# Altium PCB PCB1.PcbDoc
Units mm, origin at the board's own origin, x right, y up, seen from the top; angles counter-clockwise.
Board outline 106.01 x 106.01 mm, 2 copper layers (Top Layer, Bottom Layer), stack 1.371 mm thick; 27 components, 45 nets, 204 pads, 50 vias.
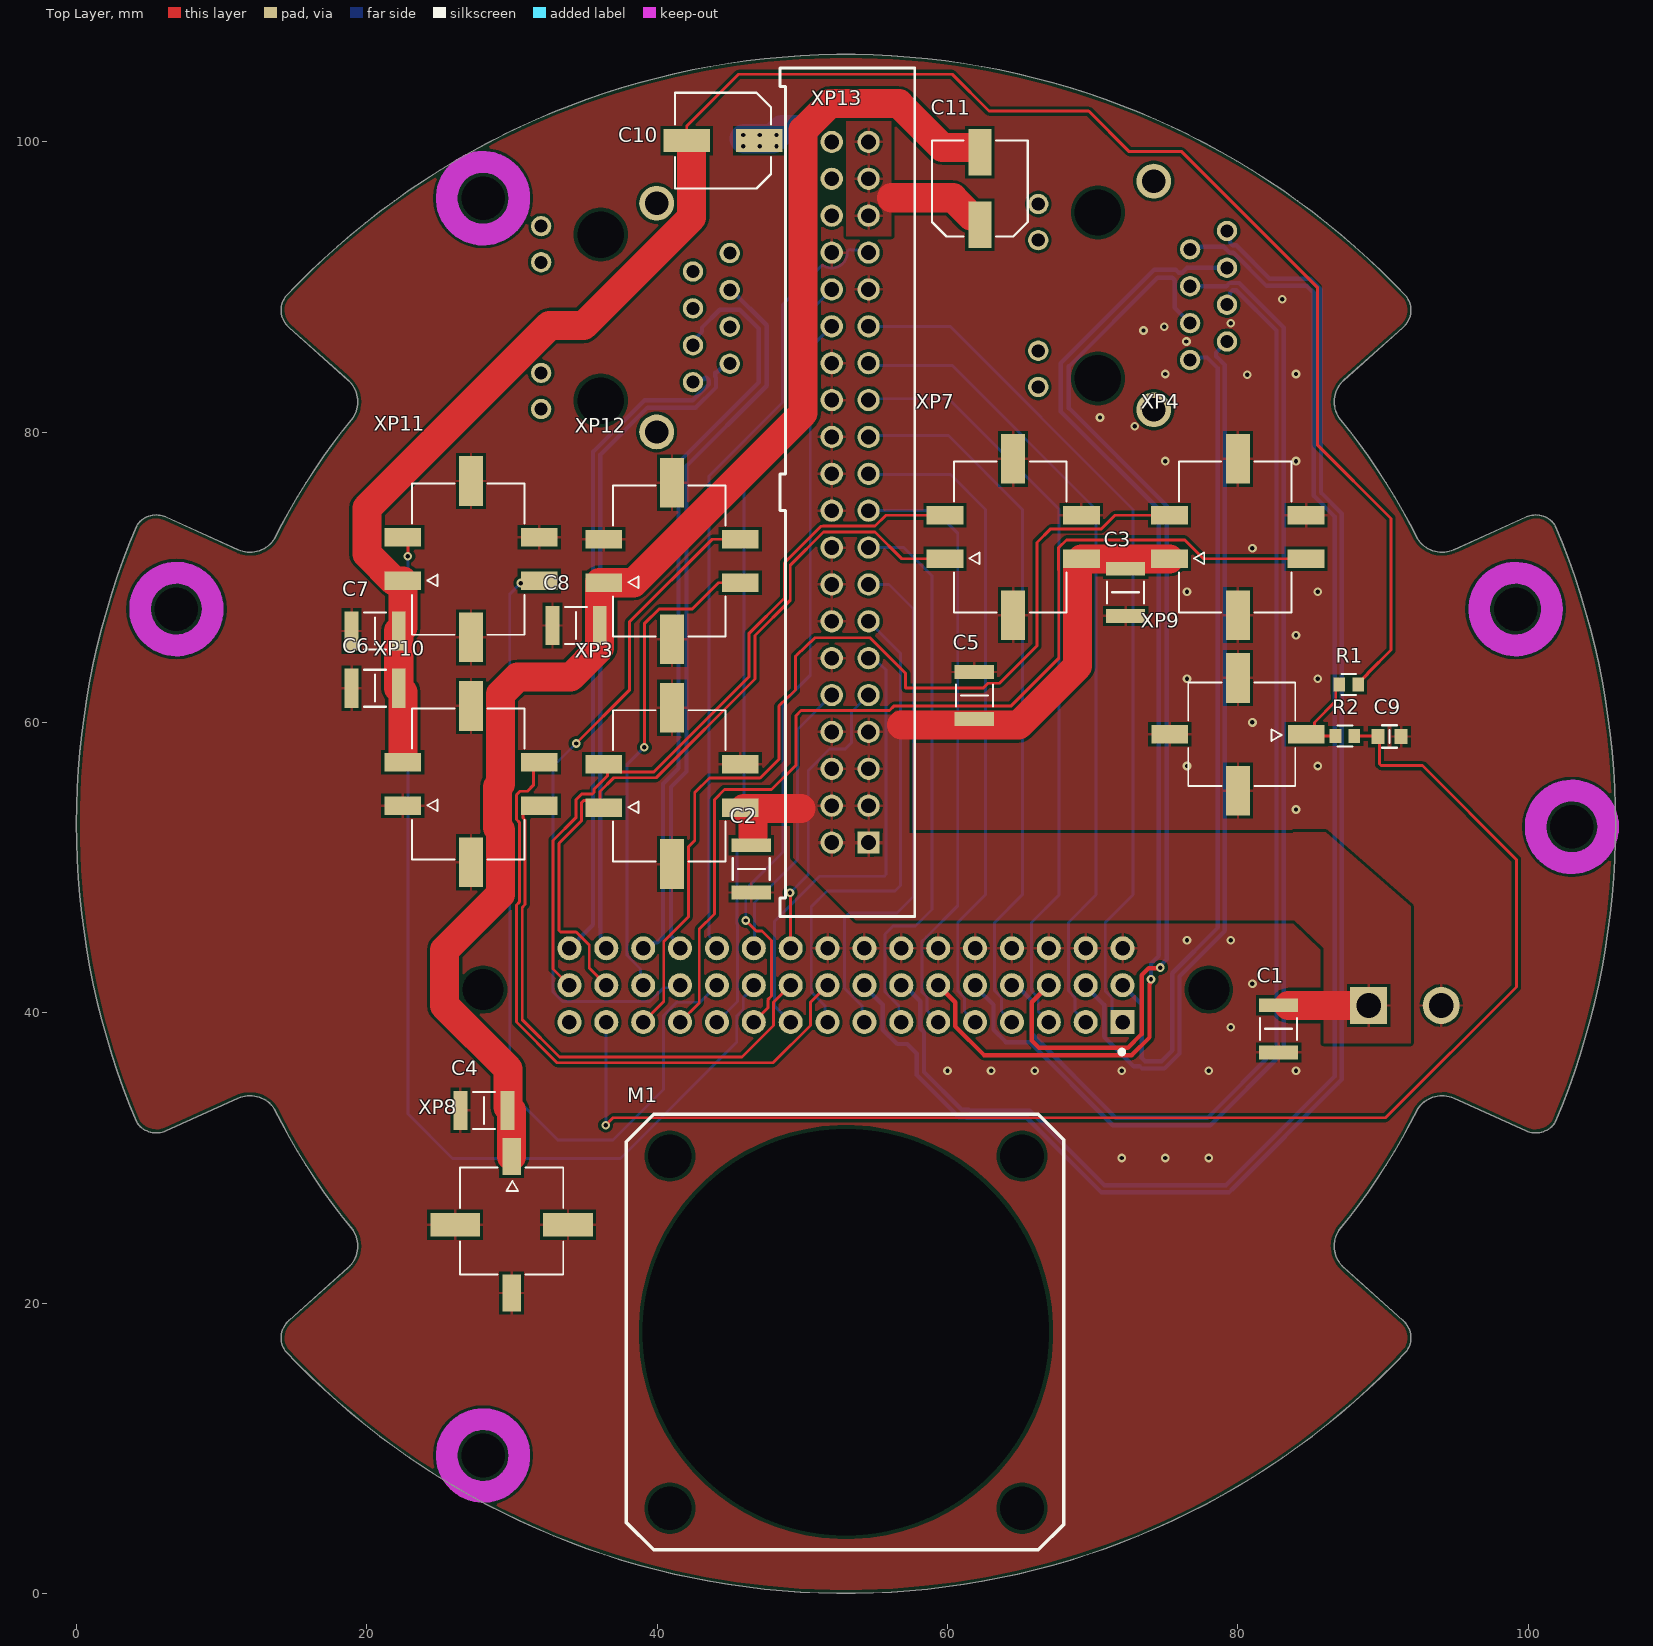
[diagram p0: Top Layer view]
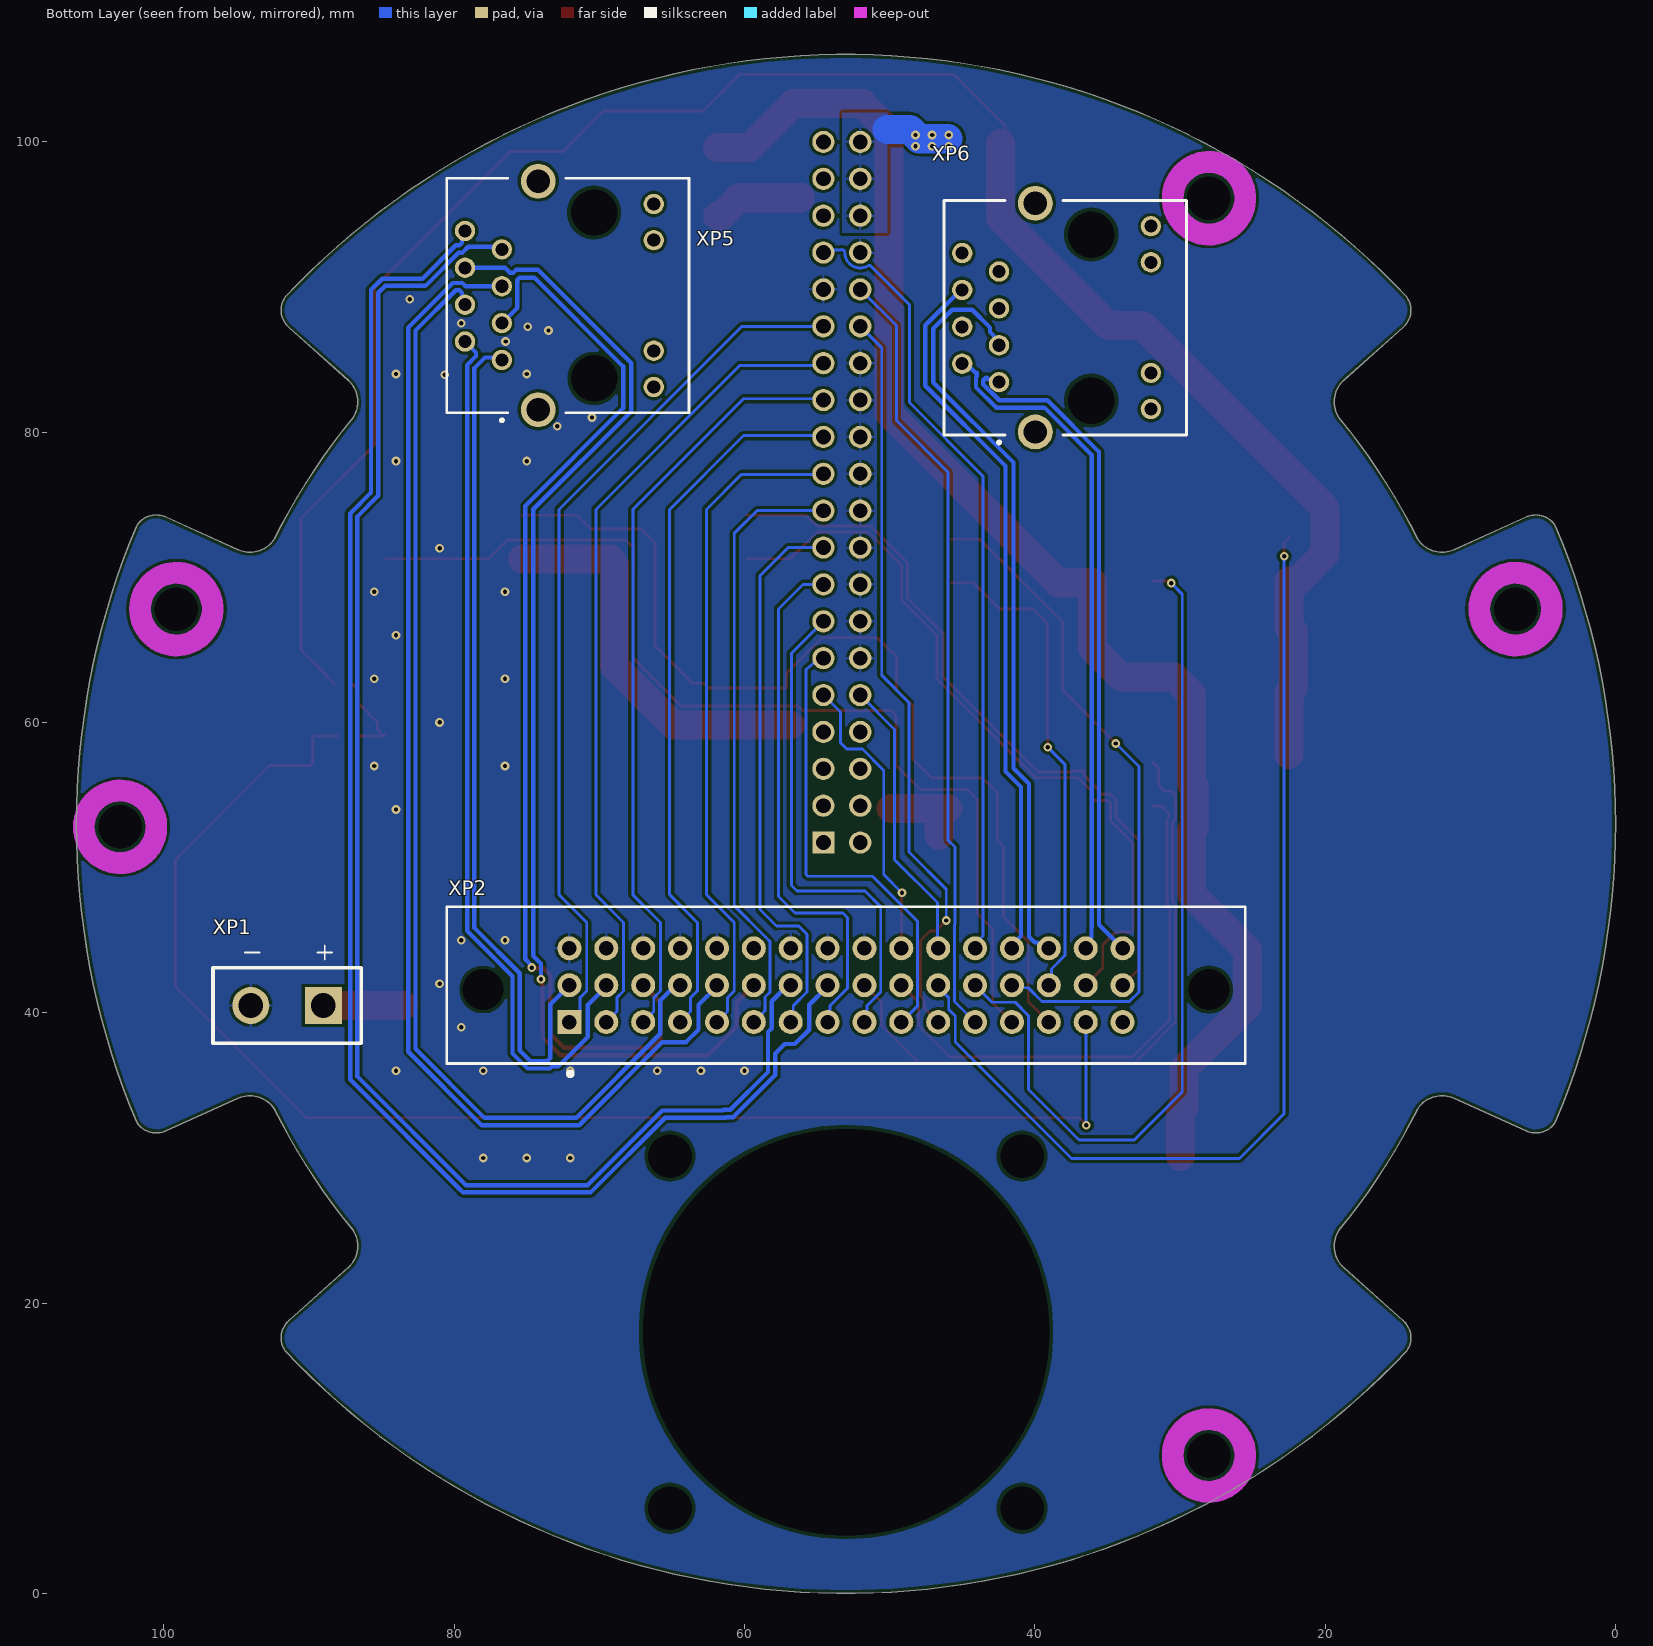
[diagram p1: Bottom Layer view, seen from below]
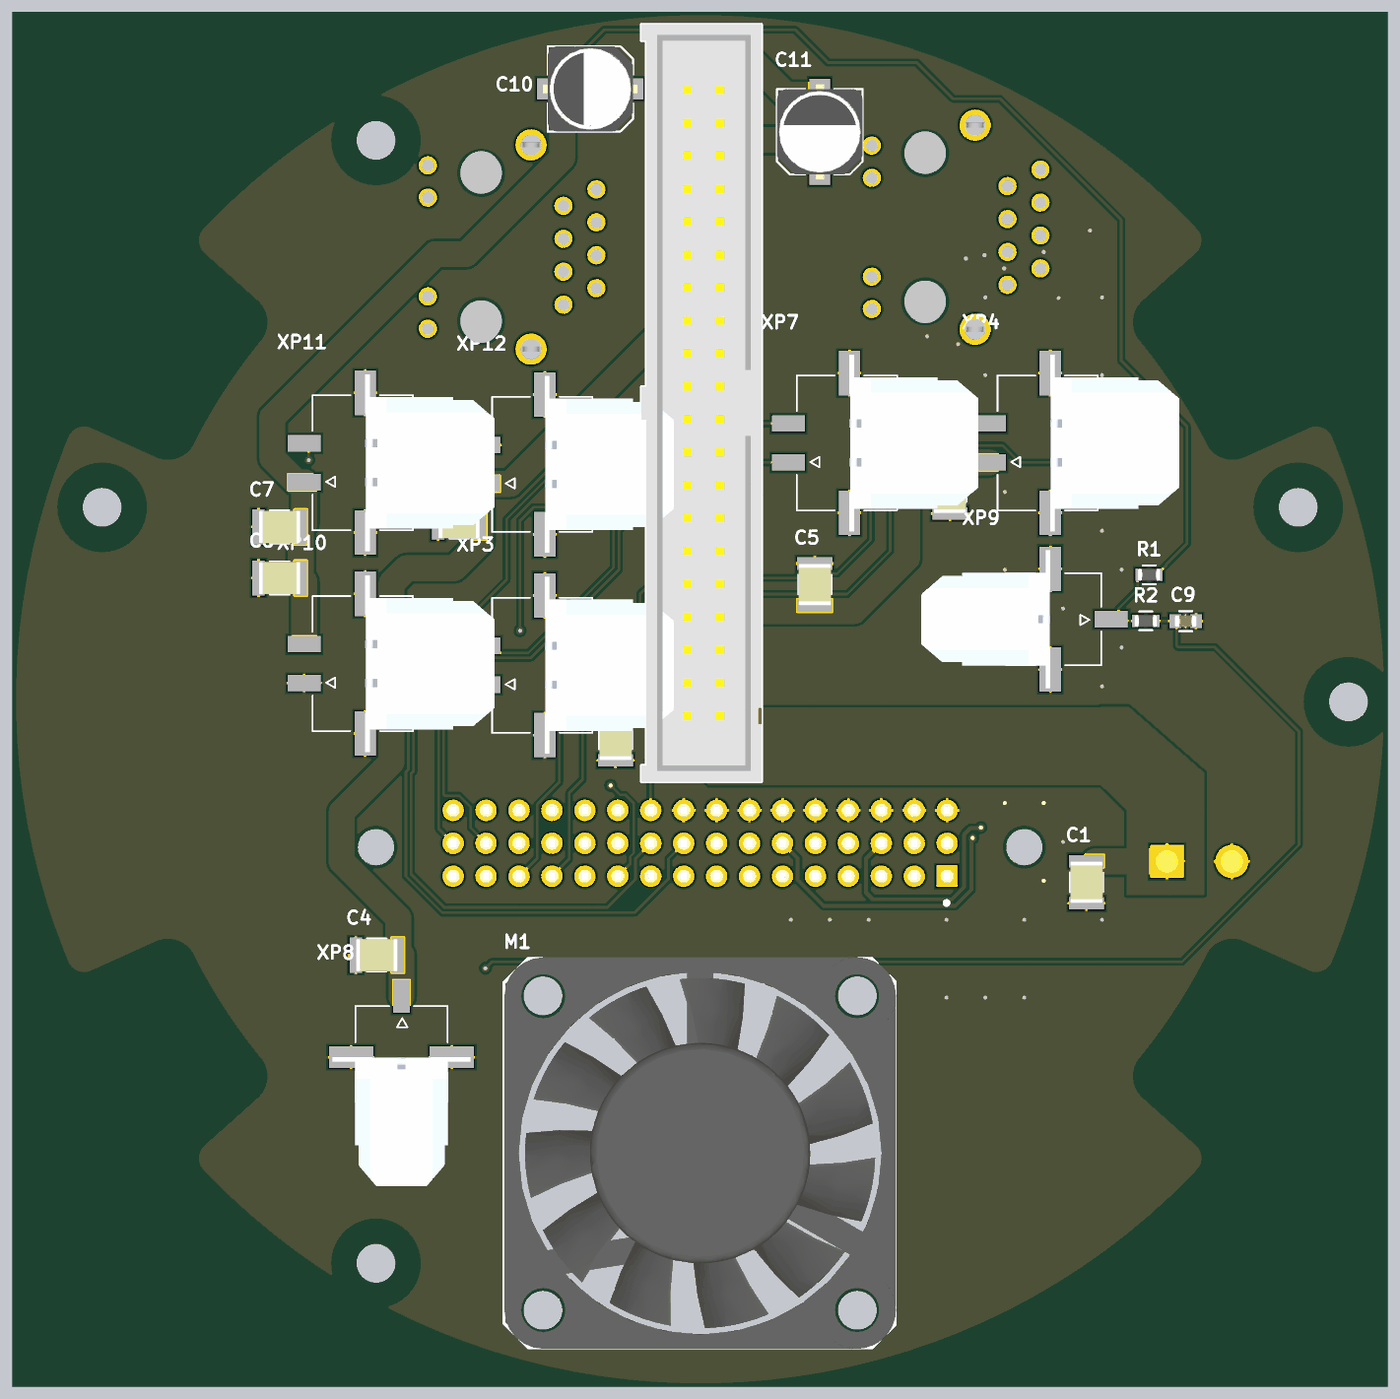
[diagram p2: 3D render of the assembled board from above, using the file's embedded part models]
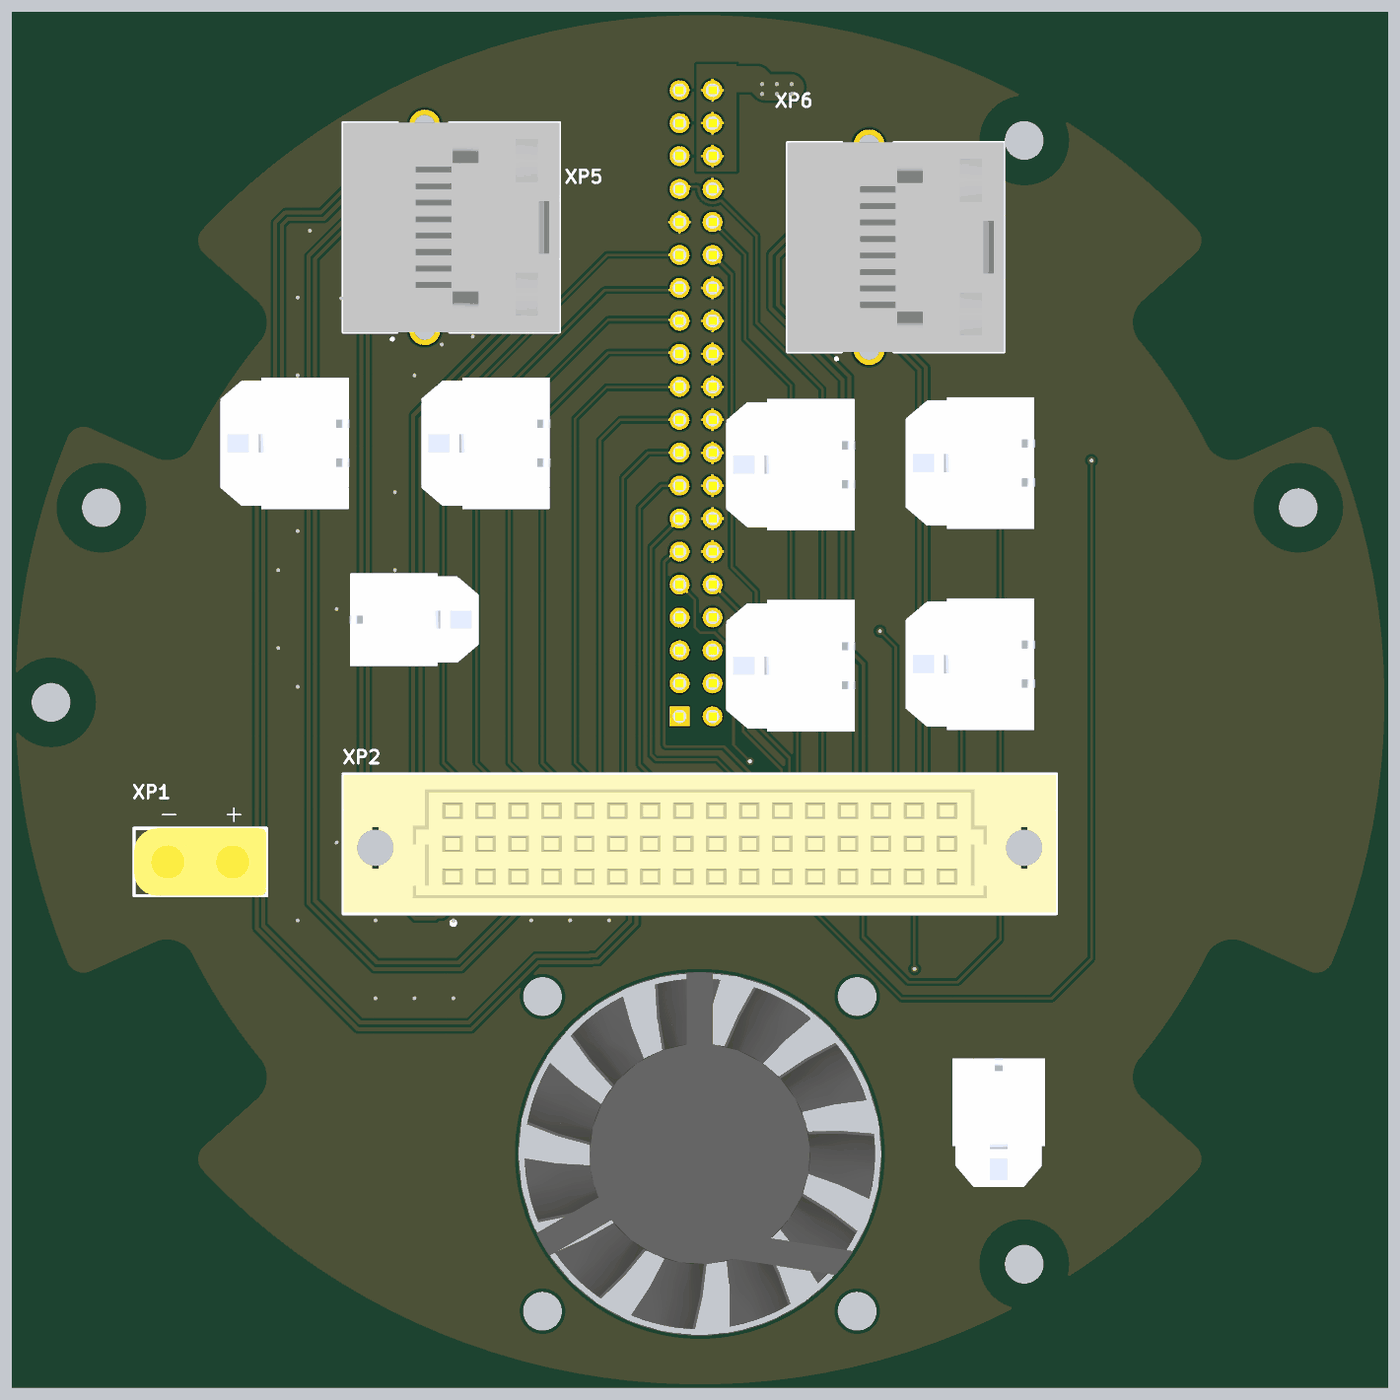
[diagram p3: 3D render of the assembled board from below, using the file's embedded part models]

## Layer stack, top to bottom
Top Solder: solder mask 0.0102, Solder Resist, Dk 3.5
Top Layer: signal copper 0.0356
Dielectric 1: dielectric 1.3, FR-4, Dk 4.8
Bottom Layer: signal copper 0.0356
Bottom Solder: solder mask 0.0102, Solder Resist, Dk 3.5

## Board outline
6.16,31.863 cw(c5.499,33.327) 4.14,32.469 4.139,32.472 cw(c53.007,53.006) 4.139,73.541 4.14,73.543 cw(c5.499,72.686) 6.16,74.15 11.14,71.903 ccw(c11.96,73.72) 13.632,72.634 cw(c53.007,53.006) 19.061,80.994 ccw(c17.389,82.079) 19.382,82.079 ccw(c17.389,82.079) 18.715,83.567 14.637,87.203 18.522,83.74 14.637,87.203 cw(c15.706,88.403) 14.37,89.295 14.371,89.297 cw(c53.007,53.006) 91.642,89.297 91.644,89.295 cw(c90.308,88.403) 91.914,88.403 cw(c90.308,88.403) 91.377,87.203 87.492,83.74 87.298,83.567 91.377,87.203 87.298,83.567 ccw(c88.624,82.079) 86.952,80.994 cw(c53.007,53.006) 92.382,72.634 ccw(c94.053,73.72) 94.873,71.903 99.853,74.15 95.109,72.01 99.854,74.15 cw(c100.514,72.686) 101.873,73.543 101.874,73.541 cw(c53.007,53.006) 106.014,53.006 cw(c53.007,53.006) 101.874,32.472 101.873,32.469 cw(c100.514,33.327) 99.854,31.863 94.873,34.11 ccw(c94.053,32.293) 94.056,34.286 ccw(c94.078,32.293) 92.406,33.379 92.395,33.386 cw(c94.078,32.293) 92.98,33.973 ccw(c94.053,32.293) 92.382,33.379 cw(c53.007,53.006) 86.952,25.019 ccw(c88.624,23.933) 87.298,22.446 91.377,18.81 87.492,22.273 91.377,18.81 cw(c90.308,17.61) 91.914,17.61 cw(c90.308,17.61) 91.644,16.718 91.642,16.716 cw(c53.007,53.006) 14.371,16.716 14.37,16.718 cw(c15.706,17.61) 14.637,18.81 18.522,22.273 18.715,22.446 14.637,18.81 18.715,22.446 ccw(c17.389,23.933) 19.382,23.933 ccw(c17.389,23.933) 19.061,25.019 cw(c53.007,53.006) 13.632,33.379 ccw(c11.96,32.293) 11.14,34.11

## Design rules (kind name [scope] priority, off if disabled: settings)
AcuteAngle [All] p1: minimum=3.50000000000000E+0001 checktracksonly=FALSE
BoardOutlineClearance "BoardOutlineClearance 1" [All] p1: gap=0.25 ignorepadtopadclearanceinfootprint=FALSE except(0: Arc-SplitContinuation Track-SplitContinuation SMDPad-SplitContinuation THPad-SplitContinuation Via-SplitContinuation Fill-SplitContinuation Poly-SplitContinuation Region-SplitContinuation Text-SplitContinuation) // Milling
BoardOutlineClearance "BoardOutlineClearance 2" [All] p2: gap=0.4 ignorepadtopadclearanceinfootprint=FALSE except(0: Arc-SplitContinuation Track-SplitContinuation SMDPad-SplitContinuation THPad-SplitContinuation Via-SplitContinuation Fill-SplitContinuation Poly-SplitContinuation Region-SplitContinuation Text-SplitContinuation) // V-Cut
Clearance "Clearance-1 1 Oz" [All] p1: gap=0.2 ignorepadtopadclearanceinfootprint=FALSE except(0.25: Arc-Hole Track-Hole SMDPad-Hole THPad-Hole Via-Hole Fill-Hole Poly-Hole Region-Hole Text-Hole) // Standart
Clearance "Clearance-2 1 Oz" [All] p2: gap=0.15 ignorepadtopadclearanceinfootprint=FALSE except(0.2: Arc-Fill Arc-Poly Track-Fill Track-Poly SMDPad-Fill SMDPad-Poly THPad-Fill THPad-Poly Via-Fill Via-Poly Fill-Fill Fill-Poly Poly-Poly; 0.25: Arc-Hole Track-Hole SMDPad-Hole THPad-Hole Via-Hole Fill-Hole Poly-Hole Region-Hole Text-Hole) // Advance
Clearance "Clearance 2 Oz" [All] p3: gap=0.3 ignorepadtopadclearanceinfootprint=FALSE except(0.25: Arc-Hole Track-Hole SMDPad-Hole THPad-Hole Via-Hole Fill-Hole Poly-Hole Region-Hole Text-Hole)
Clearance "Clearance-1 1/2 Oz" [All] p4: gap=0.125 ignorepadtopadclearanceinfootprint=FALSE except(0.2: Arc-Fill Arc-Poly Track-Fill Track-Poly SMDPad-SMDPad SMDPad-Fill SMDPad-Poly THPad-Fill THPad-Poly Via-Fill Via-Poly Fill-Fill Fill-Poly Poly-Poly Poly-Region Poly-Text; 0.25: Arc-Hole Track-Hole SMDPad-Hole THPad-Hole Via-Hole Fill-Hole Poly-Hole Region-Hole Text-Hole) // Standart
Clearance "Clearance-2 1/2 Oz" [All] p5: gap=0.1 ignorepadtopadclearanceinfootprint=FALSE except(0.15: Arc-Fill Arc-Poly Track-Fill Track-Poly SMDPad-SMDPad SMDPad-Fill SMDPad-Poly THPad-Fill THPad-Poly Via-Fill Via-Poly Fill-Fill Fill-Poly Poly-Poly Poly-Region Poly-Text; 0.25: Arc-Hole Track-Hole SMDPad-Hole THPad-Hole Via-Hole Fill-Hole Poly-Hole Region-Hole Text-Hole) // Advance
Clearance "Clearance 3 Oz" [All] p6: gap=0.35 ignorepadtopadclearanceinfootprint=FALSE except(0.25: Arc-Hole Track-Hole SMDPad-Hole THPad-Hole Via-Hole Fill-Hole Poly-Hole Region-Hole Text-Hole)
DiffPairsRouting "DiffPairsRouting 1 Oz" [All] p1: maxlimit=0.254 minlimit=0.2 mostfreqgap=0.254 toplayer_minwidth=0.2 toplayer_maxwidth=0.381 toplayer_prefwidth=0.381 bottomlayer_minwidth=0.2 bottomlayer_maxwidth=0.381 bottomlayer_prefwidth=0.381 maxuncoupledlength=12.7
DiffPairsRouting "DiffPairsRouting 1/2 Oz" [All] p2: maxlimit=0.254 minlimit=0.1 mostfreqgap=0.254 toplayer_minwidth=0.1 toplayer_maxwidth=0.381 toplayer_prefwidth=0.381 bottomlayer_minwidth=0.1 bottomlayer_maxwidth=0.381 bottomlayer_prefwidth=0.381 maxuncoupledlength=12.7
HoleSize [HasPad('M1-0')] p1: absolutevalues=TRUE maxlimit=100 minlimit=0.025 maxpercent=80.000 minpercent=20.000
HoleSize "Minimum HoleSize" [IsPad] p2: absolutevalues=TRUE maxlimit=5.9 minlimit=0.6 maxpercent=80.000 minpercent=20.000
HoleSize "Minimum HoleSize VIA 1" [IsVia] p3: absolutevalues=TRUE maxlimit=5.9 minlimit=0.3 maxpercent=80.000 minpercent=20.000 // Standart
HoleSize "Minimum HoleSize VIA 2" [IsVia] p4: absolutevalues=TRUE maxlimit=5.9 minlimit=0.2 maxpercent=80.000 minpercent=20.000 // Advance
HoleToHoleClearance Hole2HoleClearance [All] p1: gap=0.25 allowstackedmicrovias=FALSE
MinimumAnnularRing "Minimum AR VIA Standart" [IsVia] p1: minimumring=0.15
MinimumAnnularRing "Minimum AR PAD Standart" [IsPAD] p2: minimumring=0.2
MinimumAnnularRing "Minimum AR VIA Advance" [IsVia] p3: minimumring=0.1
MinimumAnnularRing "Minimum AR PAD Advance" [IsPAD] p4: minimumring=0.15
MinimumSolderMaskSliver "SolderMask Bridge Standart" [All] p1: minsoldermaskwidth=0.15 // All Masks
MinimumSolderMaskSliver "SolderMask Bridge Advance" [All] p2: minsoldermaskwidth=0.1 // Mask LDI
PlaneClearance "PlaneClearance 1 Oz" [All] p1: clearance=0.2
PlaneClearance "PlaneClearance-1 1/2 Oz" [All] p2: clearance=0.2 // Standart
PlaneClearance "PlaneClearance-2 1/2 Oz" [All] p3: clearance=0.15 // Advance
PlaneClearance "PlaneClearance 3 Oz" [All] p4: clearance=0.35
PlaneClearance "PlaneClearance 2 Oz" [All] p5: clearance=0.3
PlaneConnect "TermalConnect-1 1 Oz" [All] p1: planeconnectstyle=Relief reliefexpansion=0.2 reliefentries=4 reliefconductorwidth=0.2 reliefairgap=0.2 // Standart
PlaneConnect "TermalConnect-2 1 Oz" [All] p2: pad.planeconnectstyle=Relief pad.reliefexpansion=0.15 pad.reliefentries=4 pad.reliefconductorwidth=0.2 pad.reliefairgap=0.2 via.planeconnectstyle=Direct via.reliefexpansion=0.15 via.reliefentries=4 via.reliefconductorwidth=0.15 via.reliefairgap=0.15 // Advance
PlaneConnect "TermalConnect-1 1/2 Oz" [All] p3: planeconnectstyle=Relief reliefexpansion=0.2 reliefentries=4 reliefconductorwidth=0.2 reliefairgap=0.2 // Standart
PlaneConnect "TermalConnect-2 1/2 Oz" [All] p4: pad.planeconnectstyle=Relief pad.reliefexpansion=0.15 pad.reliefentries=4 pad.reliefconductorwidth=0.15 pad.reliefairgap=0.15 via.planeconnectstyle=Direct via.reliefexpansion=0.15 via.reliefentries=4 via.reliefconductorwidth=0.15 via.reliefairgap=0.15 // Advance
PlaneConnect "TermalConnect 3 Oz" [All] p5: planeconnectstyle=Relief reliefexpansion=0.2 reliefentries=4 reliefconductorwidth=0.35 reliefairgap=0.35 // Standart
PlaneConnect "TermalConnect 2 Oz" [All] p6: planeconnectstyle=Relief reliefexpansion=0.2 reliefentries=4 reliefconductorwidth=0.3 reliefairgap=0.3 // Standart
PolygonConnect "PolygonConnect-1 1 Oz" [All] p1: thpad.connectstyle=Relief thpad.reliefconductorwidth=0.2 thpad.reliefentries=4 thpad.polygonreliefangle="90 Angle" thpad.airgapwidth=0.2 smdpad.connectstyle=Relief smdpad.reliefconductorwidth=0.2 smdpad.reliefentries=4 smdpad.polygonreliefangle="90 Angle" smdpad.airgapwidth=0.2 via.connectstyle=Direct via.reliefconductorwidth=0.254 via.reliefentries=4 via.polygonreliefangle="90 Angle" via.airgapwidth=0.254 // Standart
PolygonConnect "PolygonConnect-2 1 Oz" [All] p2: thpad.connectstyle=Relief thpad.reliefconductorwidth=0.15 thpad.reliefentries=4 thpad.polygonreliefangle="90 Angle" thpad.airgapwidth=0.15 smdpad.connectstyle=Relief smdpad.reliefconductorwidth=0.15 smdpad.reliefentries=4 smdpad.polygonreliefangle="90 Angle" smdpad.airgapwidth=0.15 via.connectstyle=Direct via.reliefconductorwidth=0.254 via.reliefentries=4 via.polygonreliefangle="90 Angle" via.airgapwidth=0.254 // Advance
PolygonConnect "PolygonConnect-1 1/2 Oz" [All] p3: thpad.connectstyle=Relief thpad.reliefconductorwidth=0.15 thpad.reliefentries=4 thpad.polygonreliefangle="90 Angle" thpad.airgapwidth=0.2 smdpad.connectstyle=Relief smdpad.reliefconductorwidth=0.2 smdpad.reliefentries=4 smdpad.polygonreliefangle="90 Angle" smdpad.airgapwidth=0.2 via.connectstyle=Direct via.reliefconductorwidth=0.254 via.reliefentries=4 via.polygonreliefangle="90 Angle" via.airgapwidth=0.254 // Standart
PolygonConnect "PolygonConnect-2 1/2 Oz" [All] p4: thpad.connectstyle=Relief thpad.reliefconductorwidth=0.125 thpad.reliefentries=4 thpad.polygonreliefangle="90 Angle" thpad.airgapwidth=0.15 smdpad.connectstyle=Relief smdpad.reliefconductorwidth=0.125 smdpad.reliefentries=4 smdpad.polygonreliefangle="90 Angle" smdpad.airgapwidth=0.15 via.connectstyle=Direct via.reliefconductorwidth=0.254 via.reliefentries=4 via.polygonreliefangle="90 Angle" via.airgapwidth=0.254 // Advance
PolygonConnect "PolygonConnect 3 Oz" [All] p5: thpad.connectstyle=Relief thpad.reliefconductorwidth=0.35 thpad.reliefentries=4 thpad.polygonreliefangle="90 Angle" thpad.airgapwidth=0.35 smdpad.connectstyle=Relief smdpad.reliefconductorwidth=0.35 smdpad.reliefentries=4 smdpad.polygonreliefangle="90 Angle" smdpad.airgapwidth=0.35 via.connectstyle=Direct via.reliefconductorwidth=0.254 via.reliefentries=4 via.polygonreliefangle="90 Angle" via.airgapwidth=0.254
PolygonConnect "PolygonConnect 2 Oz" [All] p6: thpad.connectstyle=Relief thpad.reliefconductorwidth=0.3 thpad.reliefentries=4 thpad.polygonreliefangle="90 Angle" thpad.airgapwidth=0.3 smdpad.connectstyle=Relief smdpad.reliefconductorwidth=0.3 smdpad.reliefentries=4 smdpad.polygonreliefangle="90 Angle" smdpad.airgapwidth=0.3 via.connectstyle=Direct via.reliefconductorwidth=0.254 via.reliefentries=4 via.polygonreliefangle="90 Angle" via.airgapwidth=0.254
RoutingCorners [All] p1 off: cornerstyle=45-Degree minsetback=2.54 maxsetback=2.54
RoutingVias [All] p1: holewidth=0.3 width=0.6 viastyle="Through Hole" minholewidth=0.2 minwidth=0.4 maxholewidth=5.9 maxwidth=6.4
SilkToSilkClearance Silk2SilkClearance [All] p1 off: silktosilkclearance=0.15
SilkToSolderMaskClearance Silk2SolderMaskClearance [IsPad] p1 off: minsilkscreentomaskgap=0.15 clearancetoexposedcopper=TRUE
SolderMaskExpansion SolderMaskExpansion-1 [HoleSize = 0.3] p1: expansion=0.05 istentingtop=TRUE // Standart
SolderMaskExpansion [All] p2: expansion=0.102 istentingtop=FALSE
SolderMaskExpansion "SolderMaskExpansion LDI" [All] p3: expansion=0.025 istentingtop=FALSE // Advance
SupplyNets "Schematic Supply Nets_5" [InNet('+5')] p1: voltage=0.000
SupplyNets "Schematic Supply Nets_4" [InNet('GND')] p2: voltage=0.000
SupplyNets "Schematic Supply Nets_3" [InNet('+24_1')] p3: voltage=0.000
SupplyNets "Schematic Supply Nets_2" [InNet('+24_2')] p4: voltage=0.000
SupplyNets "Schematic Supply Nets_1" [InNet('+24')] p5: voltage=0.000
SupplyNets "Schematic Supply Nets" [InNet('+12')] p6: voltage=0.000
UnRoutedNet [All] p1: checkbadconnections=TRUE
Width "Width 1 Oz" [All] p1: maxlimit=10 minlimit=0.15 preferedwidth=0.2 checkconnectedcopper=TRUE
Width "Width 1/2 Oz" [All] p2: maxlimit=10 minlimit=0.1 preferedwidth=0.125 checkconnectedcopper=TRUE
Width "Width 3 Oz" [All] p3: maxlimit=10 minlimit=0.35 preferedwidth=0.4 checkconnectedcopper=TRUE
Width "Width 2 Oz" [All] p4: maxlimit=10 minlimit=0.3 preferedwidth=0.35 minimp=50.000000 maximp=50.000000 favimp=50.000000 checkconnectedcopper=TRUE
20 further rules are at their usual default settings.

## Classes and differential pairs
differential pair RS485: +RS485_P -RS485_N
differential pair GA: +GA_P -GA_N
differential pair eth6: +eth6_P -eth6_N
differential pair eth5: +eth5_P -eth5_N
differential pair eth4: +eth4_P -eth4_N
differential pair eth3: +eth3_P -eth3_N
differential pair eth2: +eth2_P -eth2_N
differential pair eth1: +eth1_P -eth1_N

## Components (designator, comment, footprint, x,y, rotation, side; value= is the part's Value field where it differs from the comment)
C1 "Capacitor" 1210C 82.804,38.896 r90 top value="22 мк"
C2 "Capacitor" 1210C 46.482,49.911 r90 top value="22 мк"
C3 "Capacitor" 1210C 72.263,68.961 r90 top value="22 мк"
C4 "Capacitor" 1210C 28.067,33.274 r0 top value="22 мк"
C5 "Capacitor" 1210C 61.849,61.849 r270 top value="22 мк"
C6 "Capacitor" 1210C 20.574,62.357 r0 top value="22 мк"
C7 "Capacitor" 1210C 20.574,66.294 r0 top value="22 мк"
C8 "Capacitor" 1210C 34.417,66.675 r0 top value="22 мк"
C9 "Capacitor" 0603C 90.447,59.028 r180 top value="0,1 мк"
C10 "Capacitor" ECAP_SMD_6,6x6,6 44.537,100.076 r180 top value="100 мк"
C11 "Capacitor" ECAP_SMD_6,6x6,6 62.23,96.774 r90 top value="100 мк"
M1 "cooler3030" cooler3030 53.006,18.006 r180 top
R1 "Resistor" 0603R 87.63,62.611 r180 top value="1,0 к"
R2 "Resistor" 0603R 87.376,59.055 r180 top value="1,0 к"
XP1 "XT30UPB-F" XT30UPB-F 91.506,40.5 r0 bottom
XP2 "DIN41612_48_3row_straight_female" DIN41612_48_3row_straight_female 53.006,41.9 r0 bottom locked
XP3 "430450418" MOLEX_430450418 41.021,55.626 r270 top
XP4 "430450418" MOLEX_430450418 80,72.771 r270 top
XP5 "1734577-3" 1-1734577-3-rj45-8p8c 76.708,84.963 r270 bottom
XP6 "1734577-3" 1-1734577-3-rj45-8p8c 42.464,83.439 r270 bottom
XP7 "430450418" MOLEX_430450418 64.516,72.771 r270 top
XP8 "430450218" Molex_430450218 29.972,25.4 r180 top
XP9 "430450218" Molex_430450218 80.01,59.182 r90 top
XP10 "430450418" MOLEX_430450418 27.178,55.753 r270 top
XP11 "430450418" MOLEX_430450418 27.178,71.247 r270 top
XP12 "430450418" MOLEX_430450418 41.021,71.12 r270 top
XP13 "IDC_40_Male conector" "IDC_40_Male conector" 53.295,75.855 r90 top locked

## Footprints (in the part's own frame and the unit in brackets; to place one, negate y for a bottom-side part, rotate by r counter-clockwise, add the part's x,y. Pads: shape width x height; smd on the part's side, far side on the other; paste and mask are expansions set on the pad)
1-1734577-3-rj45-8p8c [mm]
  round 1.4 hole 0.9: 1(0,0) 2(-1.27,-2.54) 3(-2.54,0) 4(-3.81,-2.54) 5(-5.08,0) 6(-6.35,-2.54) 7(-7.62,0) 8(-8.89,-2.54) 9(-10.745,10.46) 10(-8.255,10.46) 11(-0.635,10.46) 12(1.855,10.46)
  round 2.4 hole 1.6: MH1(3.43,2.5) MH2(-12.32,2.5)
  round 0 hole 3.2 unplated: MH3(1.27,6.35) MH4(-10.16,6.35)
  silkscreen extent -12.52,-3.8 4.25,12.9, body extent -12.52,-3.8 3.63,12.9, height 16.54
0603C [mm] "Chip Resistor, 2-Leads, Body 1,40x0,80mm, IPC Medium Density"
  rect 0.9x1.05 smd: 1(-0.8,0) 2(0.8,0)
  silkscreen extent -0.5,-0.77 0.5,0.77, body extent -0.85,-0.45 0.85,0.45, height 0.9
0603R [mm] "Chip Resistor, 2-Leads, Body 1.60x0.85mm, IPC Medium Density"
  rect 0.8x0.95 smd: 1(-0.65,0) 2(0.65,0)
  silkscreen extent -0.5,-0.72 0.5,0.72, body extent -0.87,-0.47 0.88,0.48, height 0.9
1210C [mm]
  rect 0.954x2.706 smd paste+0: 1(-1.625,0) 2(1.625,0)
  silkscreen extent -0.75,-1.28 0.75,1.28, body extent -2.35,-1.6 2.35,1.6, height 0.25
cooler3030 [mm]
  round 1.4 hole 3 unplated: 0(-12.125,12.125) 0(-12.125,-12.125) 0(12.125,12.125) 0(12.125,-12.125)
  round 0 hole 28 unplated: 0(0,0)
  silkscreen extent -15,-15 15.13,15, body extent -15.1,-15.1 15.1,15.1, height 6.6
DIN41612_48_3row_straight_female [mm]
  rect 1.65x1.65 hole 1: A1(19.05,2.54)
  round 1.65 hole 1: A2(16.51,2.54) A3(13.97,2.54) A4(11.43,2.54) A5(8.89,2.54) A6(6.35,2.54) A7(3.81,2.54) A8(1.27,2.54) A9(-1.27,2.54) A10(-3.81,2.54) A11(-6.35,2.54) A12(-8.89,2.54) A13(-11.43,2.54) A14(-13.97,2.54) A15(-16.51,2.54) A16(-19.05,2.54) B1(19.05,0) B2(16.51,0) B3(13.97,0) B4(11.43,0) B5(8.89,0) B6(6.35,0) B7(3.81,0) B8(1.27,0) B9(-1.27,0) B10(-3.81,0) B11(-6.35,0) B12(-8.89,0) B13(-11.43,0) B14(-13.97,0) B15(-16.51,0) B16(-19.05,0) C1(19.05,-2.54) C2(16.51,-2.54) C3(13.97,-2.54) C4(11.43,-2.54) C5(8.89,-2.54) C6(6.35,-2.54) C7(3.81,-2.54) C8(1.27,-2.54) C9(-1.27,-2.54) C10(-3.81,-2.54) C11(-6.35,-2.54) C12(-8.89,-2.54) C13(-11.43,-2.54) C14(-13.97,-2.54) C15(-16.51,-2.54) C16(-19.05,-2.54)
  round 2.5 hole 2.8 unplated: ""(-25,0.3) ""(25,0.3)
  silkscreen extent -27.5,-5.4 27.5,6.25, body extent -27.45,-5.3 27.45,5.29, height 11.3
ECAP_SMD_6,6x6,6 [mm]
  rect 3.2x1.6 smd: 1(-2.5,0) 2(2.5,0)
  silkscreen extent -3.3,-3.3 3.3,3.3, body extent -3.65,-3.3 3.65,3.3, height 7.7
"IDC_40_Male conector" [mm] "Connector; IDC"
  rect 1.53x1.53 / inner round 1.53 / far side rect 1.53x1.53 hole 1.02: 1(-24.13,-1.27)
  round 1.53 hole 1.02: 2(-24.13,1.27) 3(-21.59,-1.27) 4(-21.59,1.27) 5(-19.05,-1.27) 6(-19.05,1.27) 7(-16.51,-1.27) 8(-16.51,1.27) 9(-13.97,-1.27) 10(-13.97,1.27) 11(-11.43,-1.27) 12(-11.43,1.27) 13(-8.89,-1.27) 14(-8.89,1.27) 15(-6.35,-1.27) 16(-6.35,1.27) 17(-3.81,-1.27) 18(-3.81,1.27) 19(-1.27,-1.27) 20(-1.27,1.27) 21(1.27,-1.27) 22(1.27,1.27) 23(3.81,-1.27) 24(3.81,1.27) 25(6.35,-1.27) 26(6.35,1.27) 27(8.89,-1.27) 28(8.89,1.27) 29(11.43,-1.27) 30(11.43,1.27) 31(13.97,-1.27) 32(13.97,1.27) 33(16.51,-1.27) 34(16.51,1.27) 35(19.05,-1.27) 36(19.05,1.27) 37(21.59,-1.27) 38(21.59,1.27) 39(24.13,-1.27) 40(24.13,1.27)
  silkscreen extent -29.21,-4.45 29.21,4.82, body extent -29.21,-4.45 29.21,4.83, height 8.89
Molex_430450218 [mm]
  rect 3.43x1.65 smd mask+0.076: 0(-3.885,0) 0(3.885,0)
  rect 1.27x2.54 smd mask+0.076: 1(0,-4.7) 2(0,4.7)
  silkscreen extent -3.56,-3.94 3.56,3.43, body extent -5.32,-5.6 5.33,5.6, height 9.96
MOLEX_430450418 [mm]
  rect 3.43x1.65 smd mask+0.076: 0(-5.385,0) 0(5.385,0)
  rect 1.27x2.54 smd mask+0.076: 1(1.5,-4.7) 2(-1.5,-4.7) 3(1.5,4.7) 4(-1.5,4.7)
  silkscreen extent -5.21,-4.06 5.21,3.68, body extent -6.82,-5.6 6.83,5.6, height 9.96
XT30UPB-F [mm]
  round 2.55 hole 1.7: N(2.5,0)
  rect 2.55x2.55 / inner round 2.55 / far side rect 2.55x2.55 hole 1.7: P(-2.5,0)
  silkscreen extent -5.1,-4.15 5.1,2.6, body extent -5.1,-2.6 5.1,2.6, height 9.4

## Part data
C1 C2 C3 C4 C5 C6 C7 C8: library part Capacitor_22u_10_25V_X7R_1210C, "Конденсатор 1210C ёмкостью 22 мк 10%, 25 В, X7R", Capacity (nF)=22000, Dielectric=X7R, Tolerance=10%, Voltage (V)=25, Part Number=Capacitor_22u_10_25V_X7R_1210C
C9: library part Capacitor_0,1u_10_50V_X7R_0603C, "Конденсатор 0603C ёмкостью 0,1 мк 10%, 50 В, X7R", Capacity (nF)=100, Dielectric=X7R, Tolerance=10%, Voltage (V)=50, Part Number=Capacitor_0,1u_10_50V_X7R_0603C
C10 C11: library part JCK1V101, "Конденсатор алюминиевый электролитический 100мкФ 35В 20% SMD 6,6x6,6 мм", Capacity (uF)=100, Tolerance=20, Voltage (V)=35, Part Number=JCK1V101, Type="SMD Aluminum"
M1: "вентилятор 30*30 с дыркой на плате", Part Number=cooler3030
R1 R2: library part Resistor_1.0k_1_0603, "Резистор номиналом 1,0 кОм 1%", Tolerance=1%, Part Number=Resistor_1.0k_1_0603
XP1: "30 А (15 продолжительно), прямая мать", Value1="эта плюс", Value2="это пинус", Part Number=XT30UPB-F, System=Connector
XP2: "DIN41612R (DS1120-48F0V13), Разъем (розетка) тип B 48pin (3х16), шаг 2.54мм трехрядный прямой (ряд АBC)", Datasheet=https://cdn.promelec.ru/upload/datasheet/3/1/DS1120.pdf, Parameter 1=PWM1, Parameter 2=DSHOT8, Parameter 3=DSHOT9, Parameter 4=DSHOT10, Parameter 5=DSHOT1, Parameter 6=PWM2, Parameter 7=PWM3, Parameter 8=DSHOT2, Parameter 9=DSHOT3, Parameter 10=DSHOT4, Parameter 11=DSHOT6, Parameter 12=DSHOT7, Parameter 13=DSHOT5, Parameter 14=DCDC_EN, Parameter 15=PWM4, Part Number=DIN41612_48_3row_straight_female, System=Connector
XP3 XP7: library part Molex_430450418, "Разъем типа провод-плата, 3 мм, 4 контакт(-ов), Штыревой Разъем, для поверностного монтажа", Value1=Питание, Value2=RS485_P, Value3=RS485_N, Value4=Общий, Part Number=Molex_430450418, System=Connector
XP4: library part Molex_430450418, "Разъем типа провод-плата, 3 мм, 4 контакт(-ов), Штыревой Разъем, для поверностного монтажа", Value1=Питание, Value2=PWM1, Value3=PWM2, Value4=Общий, Part Number=Molex_430450418, System=Connector
XP5 XP6: library part 1-1734577-3-rj45-8p8c, "Модульный разъем, Cat3, RJ45, Гнездо, 8 контакт(-ов), 8 вывод(-ов), 1 порт(-ов)", Part Number=1-1734577-3-rj45-8p8c, System=Connector
XP8: library part Molex_430450218, "Разъем типа провод-плата, 3 мм, 2 контакт(-ов), Штыревой Разъем, Серия Micro-Fit для поверхностного монтажа", Value1=Питание, Value2=Общий, Value3=Корпус, Part Number=Molex_430450218, System=Connector, Value4=Корпус
XP9: library part Molex_430450218, "Разъем типа провод-плата, 3 мм, 2 контакт(-ов), Штыревой Разъем, Серия Micro-Fit для поверхностного монтажа", Value1=Выключатель, Value2=Общий, Value3=Корпус, Part Number=Molex_430450218, System=Connector, Value4=Корпус
XP10: library part Molex_430450418, "Разъем типа провод-плата, 3 мм, 4 контакт(-ов), Штыревой Разъем, для поверностного монтажа", Value1=Питание, Value2=GA_P, Value3=GA_N, Value4=Общий, Part Number=Molex_430450418, System=Connector
XP11 XP12: library part Molex_430450418, "Разъем типа провод-плата, 3 мм, 4 контакт(-ов), Штыревой Разъем, для поверностного монтажа", Value1=Питание, Value2=RX, Value3=TX, Value4=Общий, Part Number=Molex_430450418, System=Connector
XP13: "IDC 40-пиновый разъём прямая вилка", Value1=+24, Value2={Value}, Part Number="IDC_40_Male conector", System=Connector, Value3={Value}, Value4={Value}, Value5={Value}, Value6={Value}, Value7={Value}, Value8={Value}, Value9={Value}, Value10={Value}, Value11={Value}, Value12={Value}, Value13={Value}, Value14={Value}, Value15={Value}, Value16={Value}, Value17={Value}, Value18={Value}, Value19={Value}, Value20={Value}

## Free pads (board coordinates)
  rect 0x0 hole 3 unplated mask+0: 3(6.884,67.806) 3(28.006,9.505) 3(28.006,96.108) 3(99.128,67.806) 3(103.006,52.806)

## Via types
v1: diameter 0.6, hole 0.3, Top Layer to Bottom Layer, tented both sides, 50 vias

## Nets (pads, with @x,y where several pads share a name; then routed paths per layer and width w, separated by ;. In a path a pad name is that pad's centre, name@x,y a point inside that pad or via, vN(x,y) a via of type N, cw(c..) or ccw(c..) an arc to the next point about the centre after c; other vN are vias at no path point)
+5: C6.2 C7.2 C10.2 R1.1 XP10.2 XP11.1 | length 136.8
  Top Layer w0.2: C10.2 42.037,101.075 45.61,104.648 60.325,104.648 62.865,102.108 69.723,102.108 72.517,99.314 76.136,99.314 85.471,89.979 85.471,79.121 90.551,74.041 90.551,64.994 88.944,63.387 88.944,63.35 88.28,62.686 R1.1
  Top Layer w2: XP10.2@22.478,57.785 22.478,62.078 C6.2 C7.2 22.212,66.281 22.478,66.548 XP11.1 21.876,69.747 20.008,71.615 20.008,74.765 32.58,87.337 34.937,87.337 42.364,94.765 C10.2@42.364,99.876
+12: C4.2 C8.2 C11.2 XP8.1 XP12.1 | length 100.3
  Top Layer w2: XP8.1 29.972,33.274 29.732,33.514 29.732,36.126 25.356,40.502 25.356,44.309 29.203,48.156 29.203,52.58 29.008,52.775 29.008,55.551 29.203,55.746 29.203,61.947 30.375,63.119 34.036,63.119 36.042,65.125 C8.2 36.042,69.62 XP12.1 38.373,69.62 50.06,81.307 50.06,100.799 51.877,102.616 56.642,102.616 59.644,99.614 C11.2@61.849,99.614
+24: C1.2 C2.2 C3.2 C5.2 XP1.P XP3.3 XP4.1 XP7.3 XP13.1 XP13.2 XP13.3 XP13.4 XP13.5 XP13.6 XP13.7 XP13.8 | length 39.6
  Top Layer w2: XP3.3@45.991,54.078 47.951,54.078 ; 46.609,52.197 46.609,54.078 47.951,54.078 ; 49.911,54.078 47.951,54.078 ; 56.837,59.817 64.897,59.817 68.961,63.881 XP7.3@68.961,70.866 ; XP7.3 XP4.1 ; C1.2@83.471,40.5 XP1.P
+24_1: XP2.C11 XP13.10 | length 19.7
  Bottom Layer w0.2: XP2.C11 46.701,44.485 46.701,47.59 49.657,50.546 49.657,59.517 XP13.10
+24_2: XP2.C10 XP13.9 | length 20.3
  Top Layer w0.2: v1(49.149,48.26) 49.173,48.236 49.173,44.464 XP2.C10
  Bottom Layer w0.2: v1(49.149,48.26) 50.405,49.516 50.405,56.691 51.88,58.166 52.959,58.166 53.388,58.595 53.388,60.708 XP13.9
DCDC_EN: C9.2 R2.1 XP2.A15 | length 98.3
  Top Layer w0.2: v1(36.449,32.258) 36.957,32.766 90.17,32.766 99.187,41.783 99.187,50.546 92.71,57.023 89.868,57.023 89.751,57.14 89.751,58.924 89.62,59.055 R2.1
  Bottom Layer w0.2: v1(36.449,32.258) 36.473,32.282 36.473,39.336 XP2.A15
DSHOT1: XP2.A10 XP13.11 | length 32
  Bottom Layer w0.2: XP2.A10 48.071,40.485 48.071,46.293 51.181,49.403 55.636,49.403 55.753,49.52 55.753,63.627 55.492,63.888 55.462,63.888 54.925,64.425 XP13.11
DSHOT2: XP2.A9 XP13.13 | length 34.3
  Bottom Layer w0.2: XP2.A9 51.56,39.536 51.56,40.485 50.611,41.434 50.611,47.309 51.689,48.387 56.388,48.387 56.769,48.768 56.769,64.761 XP13.13
DSHOT3: XP2.A8 XP13.15 | length 36.7
  Bottom Layer w0.2: XP2.A8 54.1,39.536 54.1,40.485 52.896,41.689 52.896,46.546 53.213,46.863 56.515,46.863 57.658,48.006 57.658,67.818 55.971,69.505 XP13.15
DSHOT4: XP2.A7 XP13.17 | length 38.6
  Bottom Layer w0.2: XP13.17 56.987,72.045 58.928,70.104 58.928,47.117 57.785,45.974 56.261,45.974 55.691,45.404 55.691,41.434 56.64,40.485 56.64,39.536 XP2.A7
DSHOT5: XP2.A6 XP13.19 | length 41.9
  Bottom Layer w0.2: XP13.19 59.146,74.585 60.706,73.025 60.706,47.371 58.654,45.319 ccw(c59.356,44.44) 58.476,45.141 58.231,44.896 58.231,41.434 58.577,41.088 58.577,40.139 XP2.A6
DSHOT6: XP2.A5 XP13.21 | length 45.7
  Bottom Layer w0.2: XP13.21 54.601,77.089 60.198,77.089 62.611,74.676 62.611,48.133 60.706,46.228 60.706,41.499 61.171,41.034 61.171,40.085 XP2.A5
DSHOT7: XP2.A4 XP13.23 | length 49.3
  Bottom Layer w0.2: XP13.23 54.656,79.756 60.071,79.756 65.151,74.676 65.151,48.133 63.246,46.228 63.246,41.499 63.711,41.034 63.711,40.085 XP2.A4
DSHOT8: XP2.A3 XP13.25 | length 52.9
  Bottom Layer w0.2: XP13.25 54.656,82.296 60.071,82.296 67.691,74.676 67.691,48.133 65.786,46.228 65.786,41.499 66.251,41.034 66.251,40.085 XP2.A3
DSHOT9: XP2.A2 XP13.27 | length 56.4
  Bottom Layer w0.2: XP13.27 54.728,84.582 60.325,84.582 70.231,74.676 70.231,48.133 68.326,46.228 68.326,41.499 68.791,41.034 68.791,40.085 XP2.A2
DSHOT10: XP2.A1 XP13.29 | length 60
  Bottom Layer w0.2: XP13.29 60.162,87.285 72.771,74.676 72.771,48.133 70.866,46.228 70.866,41.499 71.331,41.034 71.331,40.085 XP2.A1
Enable: XP2.C12 XP13.33 | length 54.5
  Bottom Layer w0.2: XP2.C12 44.116,44.727 43.561,45.282 43.561,76.962 48.641,82.042 48.641,88.773 51.327,91.459 51.41,91.459 51.465,91.459 ccw(c52.025,92.365) 53.09,92.365 53.09,92.433 53.133,92.487 cw(c53.29,92.364) 53.174,92.527 53.207,92.55 53.247,92.559 cw(c53.29,92.364) 53.333,92.559 53.373,92.55 53.381,92.542 54.388,92.542 XP13.33
eth1_N: XP2.B2 XP5.2 | length 61.5
  Bottom Layer w0.3: XP2.B2 69.516,41.817 70.785,40.547 70.785,38.352 72.815,36.322 73.229,36.322 73.394,36.157 74.511,36.157 74.513,36.159 74.94,36.159 75.981,37.199 75.981,42.517 79.102,45.638 79.102,84.622 78.494,85.23 78.494,85.479 XP5.2
eth1_P: XP2.B1 XP5.1 | length 58.6
  Bottom Layer w0.3: XP2.B1 73.378,40.578 73.378,36.88 73.602,36.657 74.182,36.657 74.238,36.659 74.5,36.659 74.534,36.662 74.737,36.662 75.481,37.406 75.481,42.724 78.602,45.845 78.602,84.415 77.877,85.141 76.886,85.141 XP5.1
eth2_N: XP2.B6 XP5.6 | length 81.9
  Top Layer w0.3: XP2.B6 60.531,40.725 60.531,39.063 62.51,37.084 72.689,37.084 73.91,38.305 73.91,41.991 73.962,42.043 73.962,42.255 v1(74.019,42.313)
  Bottom Layer w0.3: v1(74.019,42.313) 74.011,42.321 74.011,43.38 74.549,43.919 74.549,74.676 67.804,81.421 67.804,84.751 74.244,91.191 75.712,91.191 75.917,90.986 76.166,90.986 76.493,91.313 XP5.6
eth2_P: XP2.B3 XP5.3 | length 75.7
  Top Layer w0.3: XP2.B3 65.801,40.725 65.801,38.085 66.302,37.584 72.425,37.584 73.369,38.528 73.369,42.582 73.85,43.063 74.612,43.063 v1(74.661,43.111)
  Bottom Layer w0.3: v1(74.661,43.111) 74.661,43.192 74.811,43.342 74.811,43.397 75.103,43.689 75.103,74.905 68.358,81.65 68.358,84.521 74.474,90.637 75.482,90.637 75.658,90.462 75.658,88.553 XP5.3
eth3_N: XP2.B5 XP5.5 | length 86.1
  Bottom Layer w0.3: XP2.B5 61.896,41.817 63.165,40.547 63.165,38.835 64.022,37.978 65.664,37.978 71.385,32.258 78.105,32.258 83.156,37.309 83.156,87.198 80.091,90.263 79.429,90.263 79.209,90.043 XP5.5
eth3_P: XP2.B4 XP5.4 | length 80.1
  Bottom Layer w0.3: XP2.B4 64.749,41.9 65.801,40.848 65.801,38.549 71.592,32.758 77.898,32.758 82.656,37.517 82.656,86.991 79.884,89.763 79.636,89.763 79.458,89.586 79.458,88.983 XP5.4
eth4_N: XP2.B8 XP5.8 | length 107.4
  Bottom Layer w0.3: XP2.B8 54.276,41.817 55.545,40.547 55.545,38.835 56.535,37.846 57.228,37.846 57.881,37.194 57.881,35.709 60.776,32.814 61.261,32.814 61.309,32.766 65.463,32.766 70.603,27.627 79.388,27.627 79.68,27.919 86.869,35.108 87.162,35.401 87.162,74.391 85.725,75.828 85.725,89.798 84.956,90.567 82.186,90.567 79.89,92.863 79.636,92.863 79.458,93.04 79.458,93.643 XP5.8
eth4_P: XP2.B7 XP5.7 | length 105.8
  Bottom Layer w0.3: XP2.B7 57.027,41.9 58.127,40.8 58.127,38.927 58.381,38.674 58.381,35.916 60.983,33.314 61.468,33.314 61.516,33.266 65.671,33.266 70.81,28.126 79.18,28.126 86.662,35.608 86.662,74.184 85.225,75.621 85.225,89.591 84.749,90.067 81.979,90.067 79.683,92.363 79.429,92.363 79.031,92.761 76.886,92.761 XP5.7
eth5_N: XP2.C15 XP6.2 | length 46.4
  Bottom Layer w0.3: XP2.C15 36.496,44.805 36.1,45.201 36.1,45.868 36.08,45.889 36.08,78.426 39.34,81.686 42.663,81.686 44.054,83.077 44.054,83.775 43.996,83.833 43.996,84.082 44.079,84.082 44.706,84.709 XP6.2
eth5_P: XP2.C16 XP6.1 | length 46.3
  Bottom Layer w0.3: XP2.C16 35.58,46.064 35.58,78.633 39.133,82.186 42.456,82.186 43.554,83.284 43.554,83.568 43.379,83.744 43.314,83.744 43.22,83.649 42.674,83.649 XP6.1
eth6_N: XP2.C13 XP6.6 | length 49.5
  Bottom Layer w0.3: XP2.C13 41.576,44.669 40.954,45.291 40.954,55.547 42.023,56.616 42.023,77.669 47.544,83.19 47.544,87.355 45.11,89.789 XP6.6
eth6_P: XP2.C14 XP6.3 | length 52.7
  Bottom Layer w0.3: XP2.C14 39.401,44.44 39.803,44.842 40.005,44.842 40.4,45.237 40.4,55.776 41.469,56.845 41.469,77.898 46.99,83.42 46.99,87.126 45.69,88.426 44.315,88.426 43.085,87.196 43.085,86.898 42.464,86.277 XP6.3
GA_N: XP2.B10 XP10.3 | length 38.2
  Top Layer w0.2: XP10.3 31.287,54.253 30.752,53.718 30.752,53.435 30.903,53.284 30.903,47.452 30.708,47.257 30.708,39.523 33.274,36.957 45.844,36.957 48.02,39.133 48.02,40.724 XP2.B10
GA_P: XP2.B9 XP10.4 | length 44.7
  Top Layer w0.2: XP10.4 31.47,56.845 31.47,55.67 31.058,55.259 30.554,55.259 30.308,55.012 30.308,53.313 30.503,53.118 30.503,47.617 30.308,47.422 30.308,39.357 33.108,36.557 47.984,36.557 50.56,39.133 50.56,40.724 XP2.B9
GND: C1.1 C2.1 C3.1 C4.1 C5.1 C6.1 C7.1 C8.1 C9.1 XP1.N XP2.C1 XP2.C2 XP2.C3 XP2.C4 XP2.C5 XP2.C6 XP2.C7 XP2.C8 XP2.C9 XP3.0 XP3.4 XP4.0 XP4.4 XP7.0 XP7.4 XP8.0 XP8.2 XP9.0 XP9.2 XP10.0 XP10.1 XP11.0 XP11.4 XP12.0 XP12.2 XP13.12 XP13.14 XP13.16 XP13.18 XP13.20 XP13.22 XP13.24 XP13.26 XP13.28 XP13.31 XP13.34
  other v1: 72,30 75,30 78,30 60,36 63,36 66,36 72,36 78,36 84,36 79.5,39 81,42 76.5,45 79.5,45 84,54 76.5,57 85.5,57 81,60 76.5,63 85.5,63 84,66 76.5,69 85.5,69 81,72 75,78 84,78 72.898,80.391 70.5,81 80.645,83.947 75,84 84,84 76.454,86.233 73.5,87 74.93,87.249 79.502,87.503 83.058,89.154
NetC10_1: C10.1 XP13.36 XP13.38 XP13.40 | length 4.5
  Bottom Layer w2: v1@45.974,100.203 47.966,100.203 v1(48.22,100.457) 48.601,100.838 50.165,100.838
  other v1: 45.934,99.695 47.077,99.695 48.22,99.695 45.934,100.457 47.077,100.457
NetC11_1: C11.1 XP13.35 XP13.37 XP13.39 | length 6.2
  Top Layer w2: 56.134,96.139 60.365,96.139 61.63,94.874 C11.1@61.849,94.874
NetR1_2: R1.2 R2.2 XP9.1 | length 6.5
  Top Layer w0.2: XP9.1 XP9.1@84.837,59.055 ; R2.2 XP9.1@84.837,59.055 ; R1.2 86.741,62.372 86.741,61.468 85.273,60 85.273,59.491 XP9.1@84.837,59.055
PWM1: XP2.A11 XP13.30 | length 51.9
  Top Layer w0.2: v1(46.101,46.355) 46.829,45.627 47.228,45.627 47.879,44.976 47.879,41.149 47.62,40.89 47.62,40.324 XP2.A11
  Bottom Layer w0.2: v1(46.101,46.355) 46.101,48.514 48.66,51.073 48.66,61.36 50.546,63.246 50.546,85.806 XP13.30
PWM2: XP2.A12 XP13.32 | length 53.8
  Bottom Layer w0.2: XP2.A12 45.531,40.775 45.531,46.079 45.501,46.109 45.501,51.412 45.974,51.885 45.974,77.234 49.53,80.79 49.53,87.33 XP13.32
PWM3: XP2.A13 XP4.3 | length 71.5
  Top Layer w0.2: XP2.A13 42.898,40.682 42.898,45.766 43.942,46.81 43.942,54.676 44.644,55.378 47.885,55.378 49.555,57.048 49.555,60.462 49.913,60.82 56.001,60.82 56.298,61.117 64.359,61.117 67.661,64.419 67.661,70.497 67.646,70.512 67.646,72.03 68.187,72.571 76.339,72.571 77.639,71.271 XP4.3@84.71,71.271
PWM4: XP2.A14 XP4.2 | length 69
  Top Layer w0.2: XP2.A14 40.451,40.775 40.451,44.906 42.146,46.601 42.146,51.417 42.591,51.862 42.591,55.164 43.598,56.171 47.095,56.171 48.387,57.463 48.387,61.143 48.448,61.203 49.47,62.173 49.53,62.233 49.53,64.559 49.591,64.619 50.867,65.83 54.666,65.83 57.118,63.378 57.118,62.357 62.451,62.357 62.791,62.697 63.586,62.697 66.167,65.278 66.167,72.39 67.113,73.336 70.61,73.336 71.545,74.271 XP4.2
RS485_N: XP2.B15 XP3.1 XP7.1 | length 52.2
  Top Layer w0.2: XP2.B15 35.32,43.076 35.32,44.667 34.422,45.565 33.348,45.565 33.231,45.682 33.231,51.671 34.632,53.072 34.798,53.238 34.798,54.493 34.915,54.61 35.837,54.61 36.058,54.61 36.058,55.235 37.014,56.191 39.935,56.191 46.736,62.992 46.736,65.982 49.168,68.414 49.168,70.827 51.451,73.11 55.006,73.11 56.845,71.271 XP7.1
RS485_P: XP2.B16 XP3.2 XP7.2 | length 50.9
  Top Layer w0.2: XP2.B16 32.831,43.025 32.831,51.861 34.398,53.428 34.398,54.659 34.8,55.061 35.54,55.061 35.658,55.178 35.658,55.4 36.565,56.308 36.565,56.591 36.616,56.642 37.44,56.642 37.491,56.591 39.769,56.591 46.336,63.158 46.336,66.148 48.768,68.58 48.768,70.993 51.285,73.51 51.427,73.51 51.437,73.52 55.006,73.52 55.757,74.271 XP7.2
UART2_RX: XP2.B14 XP12.3 | length 33.6
  Top Layer w0.2: v1(39.116,58.293) 39.116,66.794 40.14,67.818 42.418,67.818 44.22,69.62 XP12.3
  Bottom Layer w0.2: XP2.B14 38.86,42.076 38.86,43.025 37.911,43.974 37.911,57.088 v1(39.116,58.293)
UART2_TX: XP2.B13 XP12.4 | length 47.1
  Top Layer w0.2: v1(34.417,58.547) 38.081,62.211 38.081,66.91 43.791,72.62 XP12.4
  Bottom Layer w0.2: v1(34.417,58.547) 32.831,56.961 32.831,41.434 33.49,40.775 39.502,40.775 40.451,41.724 41.4,41.724 XP2.B13
UART5_RX: XP2.B12 XP11.3 | length 59.7
  Top Layer w0.2: v1(30.607,69.596) 30.715,69.596 30.866,69.747 XP11.3
  Bottom Layer w0.2: v1(30.607,69.596) 29.845,68.834 29.845,34.544 33.147,31.242 36.957,31.242 40.426,34.711 40.426,39.801 41.349,40.724 42.94,40.724 XP2.B12
UART5_TX: XP2.B11 XP11.2 | length 71.5
  Top Layer w0.2: XP11.2 22.823,72.402 v1(22.823,71.445)
  Bottom Layer w0.2: v1(22.823,71.445) 22.823,33.057 25.908,29.972 37.465,29.972 45.48,37.987 45.48,39.775 45.931,40.226 45.931,41.034 46.656,41.759 XP2.B11
pads on no net: M1.0 XP2. XP2.A16 XP5.9 XP5.10 XP5.11 XP5.12 XP5.MH1 XP5.MH2 XP5.MH3 XP5.MH4 XP6.4 XP6.5 XP6.7 XP6.8 XP6.9 XP6.10 XP6.11 XP6.12 XP6.MH1 XP6.MH2 XP6.MH3 XP6.MH4

## Polygon pours and split planes (outlines as drawn)
NetC11_1 on Top Layer "NETC11_1_L01_P005" (solid, pour order 5): 56.134,101.525 53.04,101.525 53.04,93.5 56.134,93.5
GND on Top Layer "GND_L01_P009" (solid, remove dead copper, pour order 9): 6.16,31.863 cw(c5.499,33.327) 4.14,32.469 4.139,32.472 cw(c53.007,53.006) 4.139,73.541 4.14,73.543 cw(c5.499,72.686) 6.16,74.15 11.14,71.903 ccw(c11.96,73.72) 13.632,72.634 cw(c53.007,53.006) 19.061,80.994 ccw(c17.389,82.079) 19.382,82.079 ccw(c17.389,82.079) 18.715,83.567 14.637,87.203 18.522,83.74 14.637,87.203 cw(c15.706,88.403) 14.37,89.295 14.371,89.297 cw(c53.007,53.006) 91.642,89.297 91.644,89.295 cw(c90.308,88.403) 91.914,88.403 cw(c90.308,88.403) 91.377,87.203 87.492,83.74 87.298,83.567 91.377,87.203 87.298,83.567 ccw(c88.624,82.079) 86.952,80.994 cw(c53.007,53.006) 92.382,72.634 ccw(c94.053,73.72) 94.873,71.903 99.853,74.15 95.109,72.01 99.854,74.15 cw(c100.514,72.686) 101.873,73.543 101.874,73.541 cw(c53.007,53.006) 106.014,53.006 cw(c53.007,53.006) 101.874,32.472 101.873,32.469 cw(c100.514,33.327) 99.854,31.863 94.873,34.11 ccw(c94.053,32.293) 94.056,34.286 ccw(c94.078,32.293) 92.406,33.379 92.395,33.386 cw(c94.078,32.293) 92.98,33.973 ccw(c94.053,32.293) 92.382,33.379 cw(c53.007,53.006) 86.952,25.019 ccw(c88.624,23.933) 87.298,22.446 91.377,18.81 87.492,22.273 91.377,18.81 cw(c90.308,17.61) 91.914,17.61 cw(c90.308,17.61) 91.644,16.718 91.642,16.716 cw(c53.007,53.006) 14.371,16.716 14.37,16.718 cw(c15.706,17.61) 14.637,18.81 18.522,22.273 18.715,22.446 14.637,18.81 18.715,22.446 ccw(c17.389,23.933) 19.382,23.933 ccw(c17.389,23.933) 19.061,25.019 cw(c53.007,53.006) 13.632,33.379 ccw(c11.96,32.293) 11.14,34.11
+24 on Top Layer "+24_L01_P004" (solid, remove dead copper, pour order 4): 83.825,52.425 86.057,52.425 91.9,47.332 91.9,44.23 91.9,37.9 85.9,37.9 85.9,44.442 83.825,46.458
+24 on Top Layer "+24_L01_P000" (solid, remove dead copper, pour order 0): 57.35,60.85 49.375,60.85 49.375,50.675 57.35,50.675
+24 on Top Layer "+24_L01_P001" (solid, remove dead copper, pour order 1): 54.95,46.375 84.05,46.375 84.05,52.375 54.95,52.375
+24 on Top Layer "+24_L01_P002" (solid, remove dead copper, pour order 2): 49.377,52.376 49.375,50.675 53.675,46.375 56.864,46.375 56.775,52.376
GND on Bottom Layer "GND_L02_P010" (solid, remove dead copper, pour order 10): 6.16,31.863 cw(c5.499,33.327) 4.14,32.469 4.139,32.472 cw(c53.007,53.006) 4.139,73.541 4.14,73.543 cw(c5.499,72.686) 6.16,74.15 11.14,71.903 ccw(c11.96,73.72) 13.632,72.634 cw(c53.007,53.006) 19.061,80.994 ccw(c17.389,82.079) 19.382,82.079 ccw(c17.389,82.079) 18.715,83.567 14.637,87.203 18.522,83.74 14.637,87.203 cw(c15.706,88.403) 14.37,89.295 14.371,89.297 cw(c53.007,53.006) 91.642,89.297 91.644,89.295 cw(c90.308,88.403) 91.914,88.403 cw(c90.308,88.403) 91.377,87.203 87.492,83.74 87.298,83.567 91.377,87.203 87.298,83.567 ccw(c88.624,82.079) 86.952,80.994 cw(c53.007,53.006) 92.382,72.634 ccw(c94.053,73.72) 94.873,71.903 99.853,74.15 95.109,72.01 99.854,74.15 cw(c100.514,72.686) 101.873,73.543 101.874,73.541 cw(c53.007,53.006) 106.014,53.006 cw(c53.007,53.006) 101.874,32.472 101.873,32.469 cw(c100.514,33.327) 99.854,31.863 94.873,34.11 ccw(c94.053,32.293) 94.056,34.286 ccw(c94.078,32.293) 92.406,33.379 92.395,33.386 cw(c94.078,32.293) 92.98,33.973 ccw(c94.053,32.293) 92.382,33.379 cw(c53.007,53.006) 86.952,25.019 ccw(c88.624,23.933) 87.298,22.446 91.377,18.81 87.492,22.273 91.377,18.81 cw(c90.308,17.61) 91.914,17.61 cw(c90.308,17.61) 91.644,16.718 91.642,16.716 cw(c53.007,53.006) 14.371,16.716 14.37,16.718 cw(c15.706,17.61) 14.637,18.81 18.522,22.273 18.715,22.446 14.637,18.81 18.715,22.446 ccw(c17.389,23.933) 19.382,23.933 ccw(c17.389,23.933) 19.061,25.019 cw(c53.007,53.006) 13.632,33.379 ccw(c11.96,32.293) 11.14,34.11
NetC10_1 on Bottom Layer "NETC10_1_L02_P006" (solid, pour order 6): 53.25,101.981 50.165,101.981 50.165,93.726 53.25,93.726

## Keep-outs
Keep-Out Layer:
  circle w1.5: c28.006,9.505 r2.5
  circle w1.5: c103.006,52.806 r2.5
  circle w1.5: c99.128,67.806 r2.5
  circle w1.5: c28.006,96.108 r2.5
  circle w1.5: c6.884,67.806 r2.5

## Silkscreen, mask and mechanical layers (free items; w line width, h text height)
Mechanical 1:
  circle w0.013: c99.128,67.806 r1.5
  circle w0.013: c103.006,52.806 r1.5
  circle w0.013: c28.006,9.505 r1.5
  circle w0.013: c28.006,96.108 r1.5
  circle w0.013: c6.884,67.806 r1.5
  lines w0.013: 10.901,34.009 6.157,31.869 ; 10.901,72.004 6.157,74.144 ; 18.526,22.268 14.641,18.804 ; 18.526,83.745 14.641,87.208 ; 87.487,22.268 91.372,18.804 ; 87.487,83.745 91.372,87.208 ; 92.401,33.382 cw(c94.078,32.293) 94.901,34.116 ; 95.112,34.009 99.856,31.869 ; 95.112,72.004 99.856,74.144 ; 6.157,31.869 cw(c5.499,33.327) 4.145,32.474 cw(c53.007,53.006) 4.145,73.539 cw(c5.499,72.686) 6.157,74.144 ; 6.157,31.869 11.138,34.116 cw(c11.96,32.293) 13.638,33.382 ccw(c53.007,53.006) 19.066,25.023 cw(c17.389,23.933) 18.72,22.441 14.641,18.804 ; 6.157,74.144 11.138,71.897 ccw(c11.96,73.72) 13.638,72.631 cw(c53.007,53.006) 19.066,80.99 ccw(c17.389,82.079) 18.72,83.572 14.641,87.208 ; 14.641,18.804 ccw(c15.706,17.61) 14.376,16.72 ccw(c53.007,53.006) 91.637,16.72 ccw(c90.308,17.61) 91.372,18.804 ; 14.641,87.208 cw(c15.706,88.403) 14.376,89.292 cw(c53.007,53.006) 91.637,89.292 cw(c90.308,88.403) 91.372,87.208 ; 91.372,18.804 87.294,22.441 cw(c88.624,23.933) 86.947,25.023 ccw(c53.007,53.006) 92.376,33.382 cw(c94.053,32.293) 94.876,34.116 99.856,31.869 ; 91.372,87.208 87.294,83.572 ccw(c88.624,82.079) 86.947,80.99 cw(c53.007,53.006) 92.376,72.631 ccw(c94.053,73.72) 94.876,71.897 99.856,74.144 ; 99.856,31.869 ccw(c100.514,33.327) 101.868,32.474 ccw(c53.007,53.006) 101.868,73.539 ccw(c100.514,72.686) 99.856,74.144